# Altium PCB SignalAnalyse.PcbDoc (part 2 of 2)
Units mil, origin at the board's own origin, x right, y up, seen from the top; angles counter-clockwise.
Board outline 4784 x 1800 mil, 2 copper layers (Top Layer, Bottom Layer); 103 components, 57 nets, 390 pads, 59 vias.
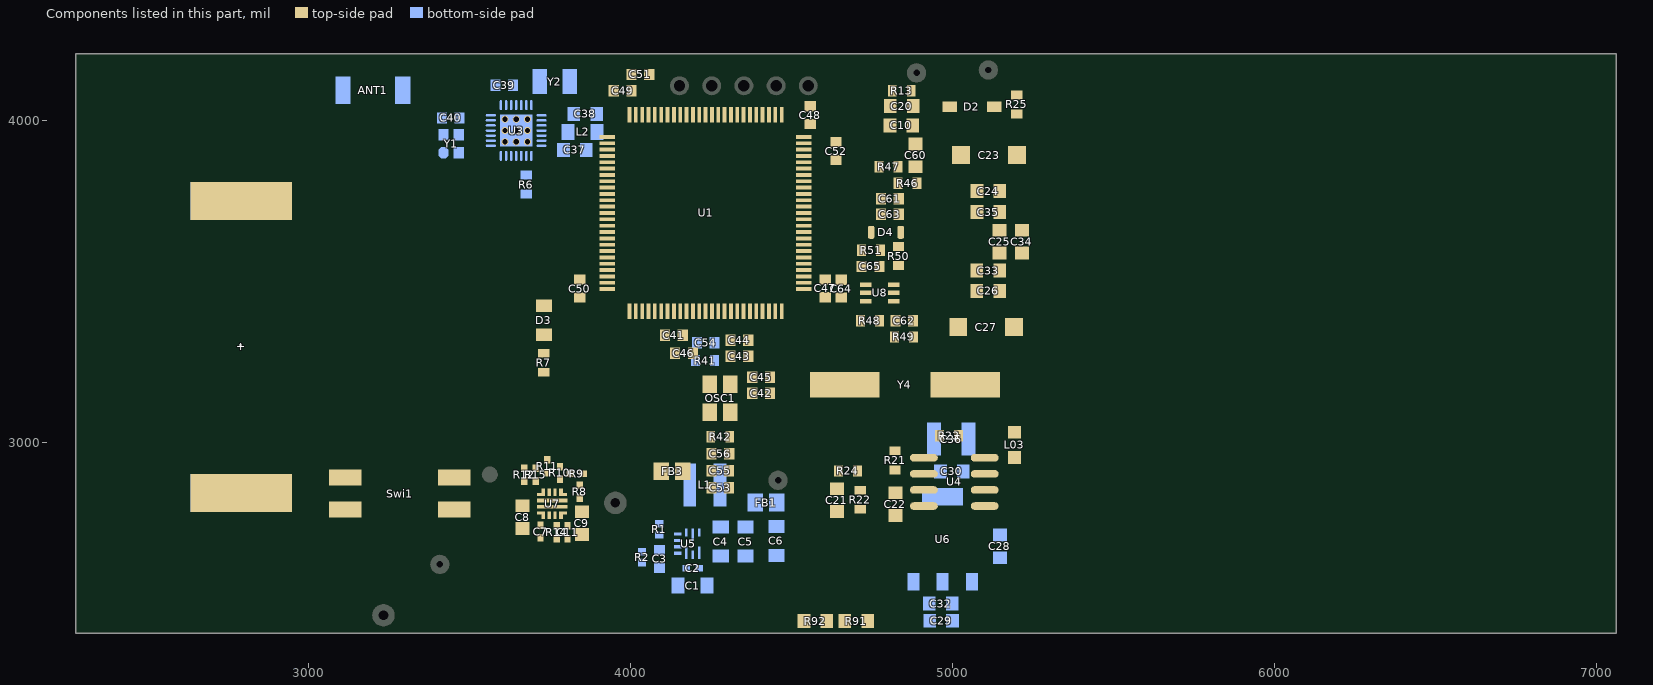
[diagram p2: the components of this part, seen from the top]

## Polygon pours and split planes (outlines as drawn) (continued)
FB on Bottom Layer "Bottom Layer-FB" (solid, pour order 148): 4023,2653 4023,2671.51 cw(c4043.49,2671.51) 4029,2686 4059.81,2716.81 cw(c4082,2694.62) 4082,2726 4099,2726 cw(c4099,2719) 4106,2719 4106,2705 ccw(c4110,2705) 4110,2701 4156,2701 cw(c4156,2698) 4159,2698 4159,2692 cw(c4157,2692) 4157,2690 4072.9,2690 ccw(c4072.9,2666.1) 4056,2683 ccw(c4072.9,2666.1) 4049,2666.1 4049,2653
GND on Bottom Layer "Bottom Layer-GND 1" (solid, pour order 149): 4023,2610 ccw(c4032.66,2610) 4025.83,2603.17 4028,2601 ccw(c4044.9,2617.9) 4044.9,2594 4106.62,2594 ccw(c4106.62,2638.38) 4138,2607 ccw(c4125.93,2619.07) 4143,2619.07 4143,2638 cw(c4152,2638) 4152,2647 4153,2647 ccw(c4153,2652) 4158,2652 4158,2660 ccw(c4155,2660) 4155,2663 4135,2663 ccw(c4135,2659) 4131,2659 4131,2654 cw(c4116,2654) 4116,2639 4023,2639
VCC_5_RF on Bottom Layer "Bottom Layer-VCC_5_RF" (solid, pour order 151): 4851,3048 cw(c4865,3048) 4865,3062 4971,3062 cw(c4971,3050) 4983,3050 4983,2870 ccw(c4991,2870) 4991,2862 5024,2862 cw(c5024,2851) 5035,2851 5035,2748 ccw(c5048,2748) 5048,2735 5166,2735 cw(c5166,2728) 5173,2728 5173,2699 cw(c5165,2699) 5165,2691 5024,2691 5006,2691 ccw(c5006,2676) 4991,2676 4991,2546 cw(c4984,2546) 4984,2539 4955,2539 cw(c4955,2549) 4945,2549 4945,2580 4945,2638.58 ccw(c4845.01,2638.58) 4915.71,2709.29 4911.36,2713.64 4880.29,2744.71 cw(c4951,2815.42) 4851,2815.42
GND on Bottom Layer "Bottom Layer-GND" (solid, pour order 153): 2636,2902 3374.58,2902 cw(c3374.58,2802) 3445.29,2872.71 3534.71,2783.29 cw(c3464,2712.58) 3564,2712.58 3564,2670 3564,2656 ccw(c3587,2656) 3587,2633 3666,2633 3677,2622 3677,2541 3689,2529 3775,2529 ccw(c3775,2543) 3789,2543 3789,2615 3798,2624 3850,2624 cw(c3850,2611) 3863,2611 3863,2607 ccw(c3904.03,2607) 3875.02,2577.98 3945.71,2507.29 ccw(c4016.42,2578) 4016.42,2478 4155.96,2478 ccw(c4155.96,2536.04) 4197,2495 ccw(c4146.31,2545.69) 4218,2545.69 4218,2563.01 4210.93,2580.07 4205.24,2585.76 4201,2596 4201,2612.93 4196,2625 4191.82,2629.18 4189,2636 4189,2665 cw(c4202,2665) 4202,2678 4216.76,2678 4224,2675 4236.07,2670 4563,2670 ccw(c4563,2685) 4578,2685 4578,3977 ccw(c4549,3977) 4549,4006 4532,4006 cw(c4532,4026) 4512,4026 4512,4143 ccw(c4497,4143) 4497,4158 4253,4158 ccw(c4253,4116) 4211,4116 4211,4097 4204,4090 4196,4098 4196,4121 ccw(c4159,4121) 4159,4158 3987,4158 3975,4146 3963,4146 3963,4194 4649,4194 cw(c4649,4174) 4669,4174 4669,2481 ccw(c4687,2481) 4687,2463 4688,2463 4688,2423 2675,2423 cw(c2675,2462) 2636,2462 2636,2547 ccw(c2635.5,2547.5) 2636,2548
VDD_A on Bottom Layer "Bottom Layer-VDD_A" (solid, pour order 166): 3816.19,4053.86 ccw(c3816.19,4079.6) 3834.4,4061.4 3851.62,4078.62 ccw(c3843.73,4087.18) 3855.37,4086.71 cw(c3874,4083) 3874,4102 3878,4102 cw(c3878,4085) 3895,4085 3895,4080 cw(c3876,4080) 3876,4061 3875,4061 ccw(c3875,4035) 3849,4035 3849,4012 ccw(c3858.66,4012) 3851.83,4005.17 3860.91,3996.09 ccw(c3875.61,4010.78) 3875.61,3990 3915,3990 cw(c3915,3987) 3918,3987 3918,3943 cw(c3911,3943) 3911,3936 3861,3936 cw(c3861,3947) 3850,3947 3850,3974 3850,3982 ccw(c3834,3982) 3834,3998 3785.24,3998 ccw(c3785.24,3987.76) 3778,3995 3773,4000 3798.34,4025.34 ccw(c3784.69,4039) 3804,4039 cw(c3819.15,4039)
NetL2_2 on Bottom Layer "Bottom Layer-NetL2_2" (solid, pour order 165): 3720,3972 3773,3972 ccw(c3773,3985) 3786,3985 3809,3985 3809,3952 3786,3952 ccw(c3774,3952) 3774,3964 3720,3964
NetU3_1 on Bottom Layer "Bottom Layer-NetU3_1" (solid, pour order 167): 3736,4011 ccw(c3736,4020) 3745,4020 3745,4154 ccw(c3739,4154) 3739,4160 3701,4160 ccw(c3701,4152) 3693,4152 3693,4087 ccw(c3700,4087) 3700,4080 cw(c3700,4072) 3708,4072 3708,4015 ccw(c3712,4015) 3712,4011
GND on Bottom Layer "Bottom Layer-GND 2" (solid, pour order 168): 3928,3986 ccw(c3916,3986) 3916,3998 3875,3998 cw(c3875,4004) 3869,4004 3869,4034 cw(c3877,4034) 3877,4042 3904,4042 ccw(c3904,4048) 3910,4048 3910,4157 ccw(c3898.84,4157) 3898.84,4168.16 3666.16,4168.16 ccw(c3666.16,4157) 3655,4157 3655,4094 cw(c3650,4094) 3650,4089 3639,4089 ccw(c3639,4085) 3635,4085 3635,4026 ccw(c3643,4026) 3643,4018 3643,4011 cw(c3634,4011) 3634,4002 3602,4002 cw(c3602,4007) 3597,4007 3597,4018 ccw(c3597,4030) 3609,4030 3609,4186 cw(c3617,4186) 3617,4194 3967,4194 cw(c3967,4186) 3975,4186 3975,3845 cw(c3970,3845) 3970,3840 3844,3840 cw(c3844,3848) 3836,3848 3836,3920 cw(c3846,3920) 3846,3930 3917,3930 ccw(c3917,3941) 3928,3941
no net on Bottom Layer "Bottom Layer-No Net" (solid, pour order 169): 3816,3890
3.3V on Bottom Layer "Bottom Layer-3.3V" (solid, pour order 170): 3777.12,3930.83 3810.17,3930.83 cw(c3810.17,3923) 3818,3923 3818,3807 3818,3802 ccw(c3829,3802) 3829,3791 3830,3791 cw(c3830,3785) 3836,3785 3836,3775 cw(c3820,3775) 3820,3759 3780,3759 3780,3860 3780,3863.93 ccw(c3762.93,3863.93) 3775,3876 cw(c3782.24,3883.24) 3772,3883.24 3772,3925.71 cw(c3777.11,3925.71)
VDD_A on Bottom Layer "Bottom Layer-VDD_A 1" (solid, pour order 171): 3602,4157 ccw(c3592,4157) 3592,4167 3570,4167 ccw(c3570,4159) 3562,4159 3562,4094 ccw(c3566,4094) 3566,4090 3589,4090 cw(c3589,4085) 3594,4085 3594,4034 ccw(c3597,4034) 3597,4031 ccw(c3597,4036) 3602,4036
BT_AT on Bottom Layer "Bottom Layer-BT_AT" (solid, pour order 172): 3722,3905 cw(c3722,3891) 3736,3891 3736,3851 cw(c3728,3851) 3728,3843 3722,3843 cw(c3722,3861.93) 3708.62,3848.54 3697.08,3860.08 cw(c3719,3882) 3688,3882 3688,3901 cw(c3692,3901) 3692,3905
3.3V on Bottom Layer "Bottom Layer-3.3V 1" (solid, pour order 173): 3766,3554 ccw(c3766,3568) 3780,3568 3780,3569 3780,3704.5 3780,3767 cw(c3804,3767) 3804,3791 3998,3791 ccw(c3998,3806) 4013,3806 4013,4120 cw(c4031,4120) 4031,4138 4154,4138 cw(c4154,4110) 4182,4110 cw(c4140.97,4109.99) 4169.98,4080.98 4155,4066 ccw(c4215.35,4005.65) 4130,4005.64 4130,3296 ccw(c4151,3296) 4151,3275 4209,3275 cw(c4209,3266) 4218,3266 4218,3011 ccw(c4229,3011) 4229,3000 4240,3000 4464,3000 4538,3000 4538,2701 cw(c4526,2701) 4526,2689 4426,2689 cw(c4426,2707) 4408,2707 4408,2712 cw(c4420,2712) 4420,2724 ccw(c4420,2732) 4428,2732 4428,2935 ccw(c4414,2935) 4414,2949 4131,2949 ccw(c4131,2934) 4116,2934 4116,2745 cw(c4105,2745) 4105,2734 4091,2734 4066,2734 cw(c4066,2755) 4045,2755 4045,2909 ccw(c4001,2909) 4001,2953 3741,2953 cw(c3741,2972) 3722,2972 cw(c3739,2972) 3739,2989 4002,2989 ccw(c4002,3032) 4045,3032 4045,3178 ccw(c4029,3178) 4029,3194 3813,3194 cw(c3813,3227) 3780,3227 3780,3428 ccw(c3755,3428) 3755,3453 3674,3453 cw(c3674,3473) 3654,3473 3655,3600 3655,3778 cw(c3662,3778) 3662,3785 3691,3785 cw(c3691,3779) 3697,3779 3697,3686 3697,3568 ccw(c3711,3568) 3711,3554
BT_TXD on Bottom Layer "Bottom Layer-BT_TXD" (solid, pour order 181): 3591,3880 3591,3842 cw(c3585,3842) 3585,3836 ccw(c3585,3827) 3576,3827 3576,3819 ccw(c3583,3819) 3583,3812 3594,3812 ccw(c3594,3820) 3602,3820 3602,3901 ccw(c3598,3901) 3598,3905 3595,3905 ccw(c3595,3901) 3591,3901
BT_RXD on Bottom Layer "Bottom Layer-BT_RXD" (solid, pour order 180): 3556,3853 cw(c3556,3862) 3547,3862 3547,3920 cw(c3552.4,3920) 3552.4,3925.4 3577.4,3925.4 cw(c3577.4,3921.47) 3577.72,3925.39 cw(c3577.72,3921.11) 3582,3921.11 3582,3861 cw(c3574,3861) 3574,3853
GND on Bottom Layer "Bottom Layer-GND 4" (solid, pour order 182): 4177.97,4065.97 4162.14,4050.14 ccw(c4196.28,4016) 4148,4016 4148,3299 ccw(c4157,3299) 4157,3290 4224,3290 4224,3853.79 ccw(c4172.79,3853.79) 4209,3890 cw(c4252.46,3933.46) 4191.3,3927.43 4191.3,3972.99 cw(c4221.01,3972.99) 4200,3994 ccw(c4173.44,4020.56) 4211,4020.56 4211,4106.5 ccw(c4208,4106.5) 4208,4109.5 4196,4109.5 cw(c4134.44,4109.5)
GND on Bottom Layer "Bottom Layer-GND 5" (solid, pour order 183): 3358,3880 cw(c3358,3890) 3348,3890 3348,4034 cw(c3352,4034) 3352,4038 3409.69,4038 cw(c3409.69,4010.69) 3429,4030 cw(c3416.93,4017.93) 3434,4017.93 3434,3994 cw(c3425,3994) 3425,3985 3391,3985 ccw(c3391,3978) 3384,3978 3384,3889 cw(c3375,3889) 3375,3880
GND on Bottom Layer "Bottom Layer-GND 3" (solid, pour order 184): 3423.58,4143 cw(c3423.58,4043) 3479.36,4126 3547,4126 3547,4168 3557,4178 3601,4178 3609,4170 3609,4164 ccw(c3617.71,4163.16) 3626.46,4163.16 3625,4168 3625,4194 3352,4194 3348,4190 3348,4150 3355,4143
Vcc_un on Bottom Layer "Bottom Layer-Vcc_un_RF" (solid, pour order 150): 4894.2,2488 cw(c4894.2,2481) 4901.2,2481 ccw(c4909.2,2481) 4909.2,2473 4942.2,2473 ccw(c4942.2,2480) 4949.2,2480 4949.2,2511 ccw(c4938.2,2511) 4938.2,2522 4919.2,2522 cw(c4919.2,2541) 4900.2,2541 4900.2,2583 ccw(c4889.2,2583) 4889.2,2594 4758.2,2594 ccw(c4758.2,2586) 4750.2,2586 4750.2,2546 ccw(c4763.2,2546) 4763.2,2533 cw(c4763.2,2525) 4771.2,2525 4771.2,2495 ccw(c4778.2,2495) 4778.2,2488
Vcc_un on Bottom Layer "VCC_UN_L02_P204" (solid, pour order 192): 4006,2799 4006,2832 ccw(c3988,2832) 3988,2850 3739.8,2850 cw(c3739.65,2897.89) 3705.89,2863.92 cw(c3787,2922.42) 3687,2922.42 3687,2967 ccw(c3672,2967) 3672,2982 3670,2982 ccw(c3670,2966) 3654,2966 3654,2915.42 ccw(c3754,2915.42) 3683.29,2844.71 3720,2808 ccw(c3777.94,2865.94) 3777.94,2784 3856,2784 cw(c3856,2744) 3896,2744 3896,2638.42 ccw(c3996,2638.42) 3925.29,2567.71 3933,2560 3963,2560 ccw(c3931.62,2591.38) 3976,2591.38 3976,2726.57 cw(c4039.8,2726.57) 3994.69,2771.69 ccw(c3967.38,2799)
GND_RF on Bottom Layer "Bottom Layer-GND" (solid, pour order 152): 4978,2477 4973,2468.52 4973,2423 5143.59,2423 ccw(c5143.59,2522.98) 5214.29,2452.29 5218,2456 ccw(c5193.89,2480.13) 5228,2480.13 5228,2480.14 5228,2791 5228,2791.01 ccw(c5182.16,2791.01) 5214.56,2823.43 5134.29,2903.71 ccw(c5063.59,2833.02) 5063.59,2933 5015,2933 5011,2929 5011,2895 5015.24,2884.76 5016,2884 5025.65,2880 5047,2880 5057,2870 5057,2761 ccw(c5073,2761) 5073,2745 5175,2745 5181,2739 5181,2675 5172,2666 5130,2666 5118,2654 5118,2616 cw(c5105,2616) 5105,2603 5040,2603 5030,2593 5030,2536 5018,2524 4983,2524 4978,2519

## Keep-outs
Keep-Out Layer:
  the board outline again, w10

## Other copper
Top Layer:
  rectangle net GND_RF: 5176,4064 5217,4147
  rectangle net GND: 4799,3457 4873,3471
  rectangle net NetR91_2: 4589,2423 4686,2468
  rectangle net NetC61_2: 4762,3578 4850,3614
  rectangle net NetC61_2: 4814,3582 4850,3822
  rectangle net NetC60_2: 4875,3785 4907,3876
  rectangle net NetC60_2: 4816,3835 4907,3876
  rectangle net GND: 4861,3309 4930,3515
  rectangle net GND: 4619,3938 4751,4040
  rectangle net VBAT: 3358,2731 3602,2946
  rectangle net NetBT1_1: 2584,2733 3222,2950
  region net NetOSC1_1: 4336,2998 4336,3124 4286,3124 4286,2998
  rectangle net NetC21_2: 4619,2835 4664,2934
  region net NetD3_1: 3758,3262 3758,3355 3705,3355 3705,3262
  region net GND_RF: 4988,3964.5 4988,3299.5 5097,3299.5 5097,3964.5
Bottom Layer:
  rectangle net GND: 4623,3291 4930,4084
  rectangle net Vcc_un: 4135,2710 4177,2733
  rectangle: 2974.52,4049.39 3132,4137
  rectangle net ANT: 3268.26,4049.39 3347,4137
  region net Vcc_un: 4688,2699 4688,2533 4822,2533 4822,2697 4820,2699
  region net Vcc_un: 4771.2,2493.61 4772.59,2495 4949.2,2495 4949.2,2427.8 4950,2427 4771,2427

## Silkscreen, mask and mechanical layers (free items; w line width, h text height)
Top Overlay:
  text "Vin+" at 5162,4151 h30
  text "3V3" at 4091,4148 h36
  text "TMS" at 4207,4148 h36
  text "TCK" at 4319,4148 h36
  text "RST" at 4435,4148 h36
  text "GND" at 4551,4148 h36
  text "RFID" at 4927,4140 h30
  text "-" at 2633,3615 h60
  text "Simiao Niu" at 5916,3297 h50
  text "5V" at 4809,3029 h30
  text "VBAT" at 3488,2948 h30
  text "VCC" at 3916,2865 h30
  text "3V3" at 4415,2797 h30
  text "GND" at 3371,2533 h30
  text "GND" at 3281,2448 h30
Bottom Overlay:
  lines w10: 3228.5,4075 3228.5,4112 3253.5,4112 3253.5,4075 3228.5,4075
  text "+" at 2673,3615 h60

## Text inside footprints (layer, text, board x,y; h text height)
D2: Top Overlay "+" at 5130.1,4062 h48
U5: Bottom Overlay "*" at 4163.12,2765.5 h50 r90; Mechanical 13 "*" at 4188.38,2709.5 h50 r90
U7: Top Overlay "*" at 3794,2878 h30 r270; Mechanical 13 "*" at 3766.98,2843.54 h50 r270